# Altium PCB Necklace_pcb.PcbDoc
Units mm, origin at the board's own origin, x right, y up, seen from the top; angles counter-clockwise.
Board outline 19 x 27.9 mm, 2 copper layers (Top Layer, Bottom Layer), stack 0.36 mm thick; 18 components, 16 nets, 55 pads, 20 vias.
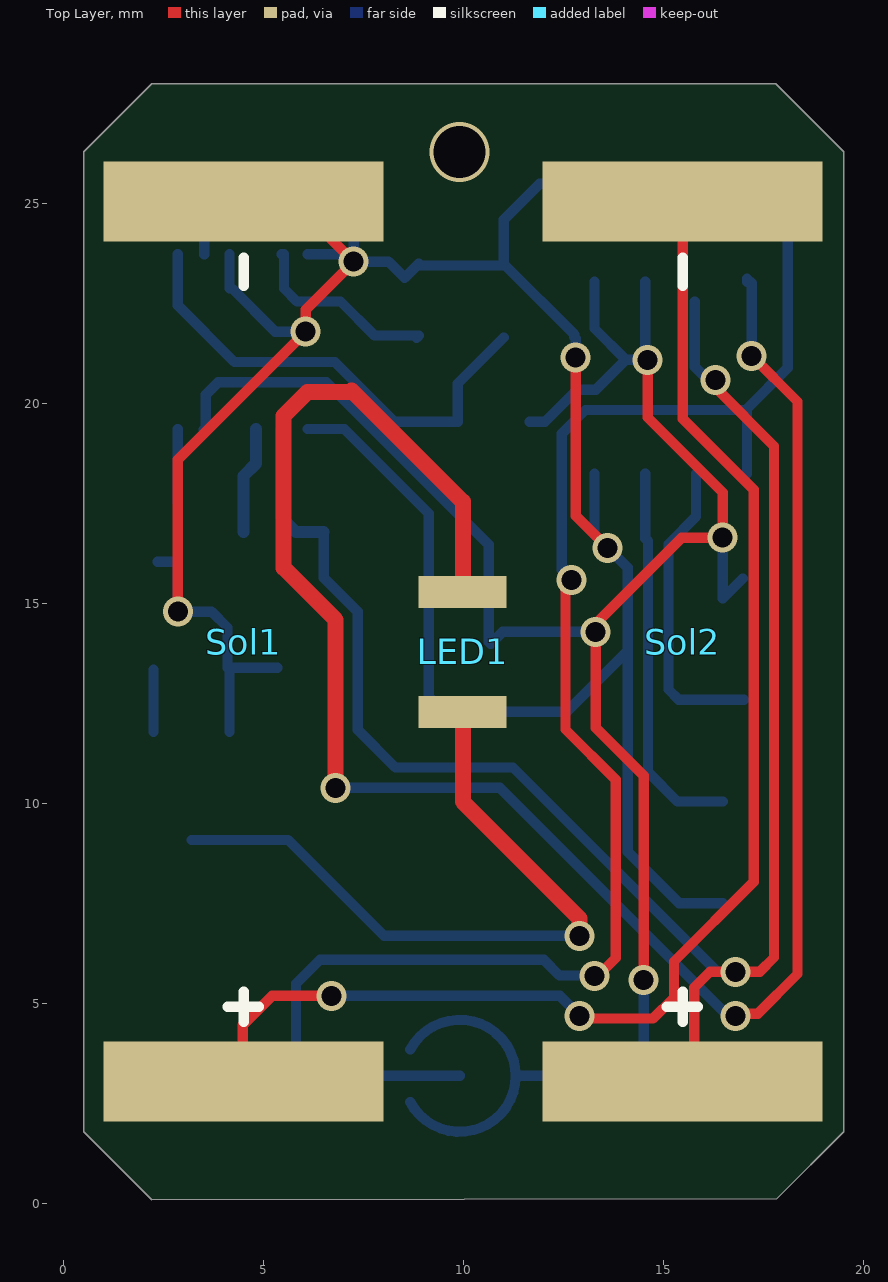
[diagram p0: Top Layer view]
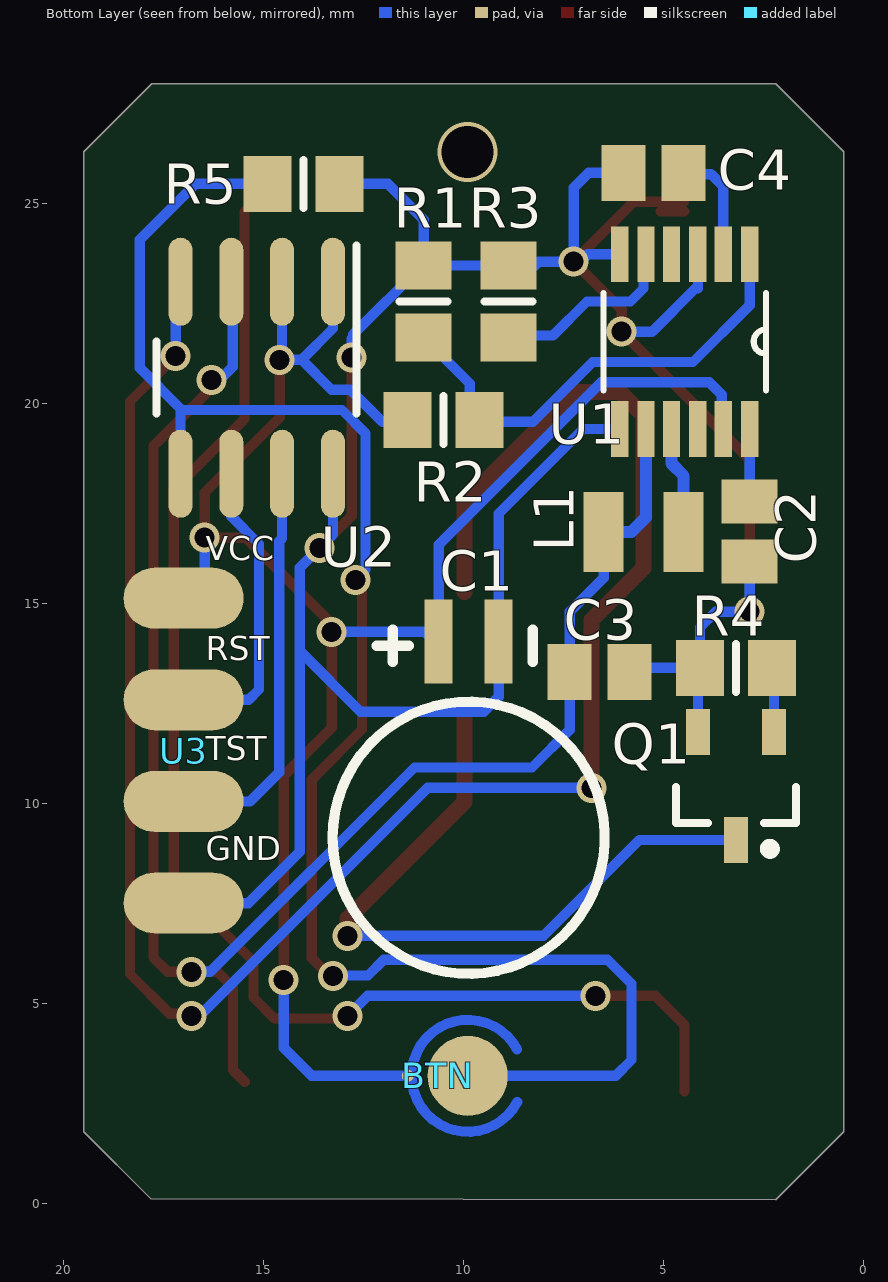
[diagram p1: Bottom Layer view, seen from below]

## Layer stack, top to bottom
Top Solder: solder mask 0.0102, Solder Resist, Dk 3.5
Top Layer: signal copper 0.03
Core: core 0.3, Dk 4.2
Bottom Layer: signal copper 0.03
Bottom Solder: solder mask 0.0102, Solder Resist, Dk 3.5

## Board outline
0.5,1.8 0.5,26.3 2.2,28 17.8,28 19.5,26.3 19.5,1.8 17.83,0.13 2.2,0.1

## Design rules (kind name [scope] priority, off if disabled: settings)
Clearance [All] p1: gap=0.254 ignorepadtopadclearanceinfootprint=FALSE except(0: Arc-Hole Track-Hole SMDPad-Hole THPad-Hole Via-Hole Fill-Hole Poly-Hole Region-Hole Text-Hole; 0.05: SMDPad-SMDPad SMDPad-THPad THPad-THPad; 0.125: Fill-Fill Fill-Poly Fill-Region Poly-Poly Poly-Region Region-Region)
PolygonConnect [All] p1: connectstyle=Relief reliefconductorwidth=0.254 reliefentries=4 polygonreliefangle="90 Angle" airgapwidth=0.254
RoutingVias [All] p1: holewidth=0.711 width=2 viastyle="Through Hole" minholewidth=0.5 minwidth=0.6 maxholewidth=2 maxwidth=3
SolderMaskExpansion [All] p1: expansion=0.1
Width [All] p1: maxlimit=1 minlimit=0.254 preferedwidth=0.254
30 further rules are at their usual default settings.

## Components (designator, comment, footprint, x,y, rotation, side; value= is the part's Value field where it differs from the comment)
BTN "Touch_sensor" TOUCH_SENSOR 9.9,3.2 r180 bottom
C1 "DMS3R3224R Supercap" "DMS3R3224R Supercap" 9.875,9.152 r90 bottom
C2 "Cap Semi" C0805 2.851,16.802 r90 bottom value=1uF
C3 "Cap Semi" C0805 6.6,13.3 r0 bottom value=10uF
C4 "Cap Semi" C0805 5.25,25.775 r0 bottom value=4.7uF
L1 "Inductor" INDUCTIVITY 6.75,15.3 r180 bottom
LED1 "3528_LED" 3528_LED 9.975,12.3 r90 top
Q1 "JFET" SOT23_N 3.196,10.224 r270 bottom
R1 "Res3" 6-0805_N 11,22.558 r270 bottom value=510k
R2 "Res3" 6-0805_N 10.5,19.6 r0 bottom value=1.1M
R3 "Res3" 6-0805_N 8.875,22.552 r270 bottom value=300k
R4 "Res3" 6-0805_N 3.193,13.4 r180 bottom value="200 (R=UGS/Id)"
R5 "Res3" 6-0805_N 14,25.5 r0 bottom value=8.2M
Sol1 "Solar Panel" Solarzelle 8,1.052 r90 top
Sol2 "Solar Panel" Solarzelle 18.975,1.052 r90 top
U1 "LTC3105EMSPBF" SOP65P490X110-12N 4.477,21.554 r270 bottom
U2 "MSP430G2210IDR" MSP430G2210 15.175,20.652 r270 bottom
U3 "Program_connector" PROGRAM_CONNECTOR 17,15.14 r0 bottom

## Footprints (in the part's own frame and the unit in brackets; to place one, negate y for a bottom-side part, rotate by r counter-clockwise, add the part's x,y. Pads: shape width x height; smd on the part's side, far side on the other; paste and mask are expansions set on the pad)
6-0805_N [mm] "Chip Resistor, Body 2.0x1.2mm, IPC Medium Density"
  rect 1.2x1.4 smd: 1(-0.9,0) 2(0.9,0)
  silkscreen extent 0,-0.6 0,0.6, body extent -1.07,-0.7 1.07,0.7, height 0.7
3528_LED [mm]
  rect 0.8x2.2 smd: 0(3,0) 1(0,0)
  body extent -0.25,-1.25 3.25,1.25, height 1
C0805 [mm] "Chip Capacitor, Body 2.0x1.3mm, IPC High Density"
  rect 1.1x1.4 smd: 1(-0.75,0) 2(0.75,0)
  body extent -1.1,-0.72 1.1,0.72, height 1.4
"DMS3R3224R Supercap" [mm]
  rect 2.1x0.7 smd: 0(4.9,0.75) 1(4.9,-0.75)
  silkscreen extent -3.4,-3.4 5.2,3.4, body extent -3.4,-3.4 5.6,3.4, height 1.8
INDUCTIVITY [mm]
  rect 1x2 smd: 0(0.25,1.5) 1(2.25,1.5)
  body extent -0.25,0 2.75,3, height 1
MSP430G2210 [mm] "SOIC, 8-Leads, Body 4.9x3.9mm, Pitch 1.27mm, IPC Medium Density"
  oval 2.2x0.6 smd: 1(-2.4,1.905) 2(-2.4,0.635) 3(-2.4,-0.635) 4(-2.4,-1.905) 5(2.4,-1.905) 6(2.4,-0.635) 7(2.4,0.635) 8(2.4,1.905)
  silkscreen extent -3.3,-2.5 0.9,2.5, body extent -3,-2.45 3,2.45, height 1.63
PROGRAM_CONNECTOR [mm]
  oval 3x1.524 smd: 0(0,0) 1(0,2.54) 2(0,5.08) 3(0,7.62)
Solarzelle [mm]
  rect 2x7 smd: 0(2,3.5) 1(24,3.5)
  silkscreen extent 3.5,3.12 22.6,3.9, body extent 2,0 24,7, height 1.6
SOP65P490X110-12N [mil]
  rect 55x17 smd: 1(-86,64) 2(-86,38) 3(-86,13) 4(-86,-13) 5(-86,-38) 6(-86,-64) 7(86,-64) 8(86,-38) 9(86,-13) 10(86,13) 11(86,38) 12(86,64)
  silkscreen extent -48,-80 48,80
SOT23_N [mm] "SOT23, 3-Leads, Body 2.9x1.3mm, Pitch 0.95mm, Lead Span 2.3mm - Reverse Pinning, IPC Medium Density"
  rect 1.15x0.6 smd: 1(1.125,0) 2(-1.576,-0.95) 3(-1.576,0.95)
  silkscreen extent -0.2,-1.5 1.47,1.5, body extent -0.7,-1.5 0.7,1.5, height 1.1
TOUCH_SENSOR [mm]
  round 2 smd mask+0.1: 0(0,0)
  round 0.3 smd: 1(-1.5,0)
  Top Layer lines w0.254: 1.238,-0.654 cw(c0,0) 1.235,0.659

## Part data
C1: Capacity=220mF
C2 C3 C4: "Capacitor (Semiconductor SIM Model)", LatestRevisionDate=29-May-2009, LatestRevisionNote="IPC-7351 Footprint Added.", PackageDescription="Chip Capacitor", PackageReference=C1206, Published=8-Jun-2000, Publisher="Altium Limited"
L1: library part Inductivity
Q1: library part MOSFET-N, "N-Channel MOSFET", LatestRevisionDate=17-Jul-2002, LatestRevisionNote="Re-released for DXP Platform.", PackageDescription="TO, Flat Index; 3 In-Line, Axial Leads; Body Dia. 4.6mm; Lead Dia. 0.5 mm (max)", PackageReference=E3, PackageVersion=1995/1996, Published=8-Jun-2000, Publisher="Altium Limited"
R1 R2 R3 R4 R5: "Resistor", LatestRevisionDate=29-May-2009, LatestRevisionNote="IPC-7351 Footprint Added.", PackageDescription="Chip Resistor", PackageReference=J1-0603, Published=8-Jun-2000, Publisher="Altium Limited"
Sol1 Sol2: library part Solar_Panel
  Sol2: Name=KXOB22-04X3F, Vmpp=1.5V
U1: "Ic Conv Dc/Dc Step Down 12-Msop", Package="MSOP-12 Linear Technology", Availability=Unavailable, MF="Linear Technology/Analog", MP=LTC3105EMS#PBF, Price=None, SnapEDA_Link=https://www.snapeda.com/parts/LTC3105EMS%23PBF/Linear%20Technology/Analog%20Devices/view-part/?ref=snap
U2: "MIXED SIGNAL MICROCONTROLLER, D0008A", Alternate Manufacturer="Texas Instruments", Alternate PartNumber=MSP430G2210ID, ComponentLink1Description="Datasheet Link", ComponentLink1URL=http://www.ti.com/lit/ds/symlink/msp430g2210.pdf, CompType=IC, LatestRevisionDate=2015-05-28, Manufacturer="Texas Instruments", MountType=SMT, PackageReference=D0008A, PartNumber=MSP430G2210IDR, Publisher="Texas Instruments", RoHS=Y, SymbolCreator=Altium, SymbolVersion=2015-05-26, U/M=EA

## Via types
v1: diameter 0.75, hole 0.5, Top Layer to Bottom Layer, 19 vias
v2: diameter 1.5, hole 1.3, Top Layer to Bottom Layer, 1 vias

## Nets (pads, with @x,y where several pads share a name; then routed paths per layer and width w, separated by ;. In a path a pad name is that pad's centre, name@x,y a point inside that pad or via, vN(x,y) a via of type N, cw(c..) or ccw(c..) an arc to the next point about the centre after c; other vN are vias at no path point)
Capacitive_Sensor: BTN.0 R5.2 U2.5 | length 43.4
  Top Layer w0.254: v1@12.7,15.5 v1(12.7,15.6) 12.544,15.444 12.544,11.856 13.8,10.6 13.8,6.144 v1@13.4,5.744
  Bottom Layer w0.254: BTN.0 6.2,3.2 5.805,3.595 5.805,5.5 6.405,6.1 12,6.1 12.392,5.708 13.262,5.708 v1(13.27,5.7) ; v1(12.7,15.6) 12.452,15.848 12.452,19.252 13.044,19.844 17.044,19.844 17.08,19.88 ; R5.2 16.701,25.5 18.1,24.101 18.1,20.9 17.08,19.88 ; U2.5 17.08,19.88
FB: R1.2 R2.1 U1.1 | length 12.1
  Bottom Layer w0.254: U1.1 2.851,22.462 4.267,21.046 6.774,21.046 8.268,19.552 9.85,19.552 9.85,20.508 R1.2
GND: C1.1 C2.1 C3.1 C4.2 Q1.2 R1.1 R3.1 R4.1 R5.1 Sol1.1 U1.3 U1.6 U1.7 U2.8 U3.3 | length 71.8
  Top Layer w0.254: v1(2.851,14.802) 2.851,18.603 v1(6.05,21.802) 6.05,22.352 v1(7.25,23.552) 5.75,25.052 Sol1.1 ; Sol1.1@4.477,24.804 Sol1.1@5.075,24.804 ; v1(12.8,21.16) 12.8,17.2 v1(13.6,16.4)
  Bottom Layer w0.254: C2.1@2.352,16.052 C2.1 v1(2.851,14.802) 3.698,14.802 4.093,14.407 R4.1 C3.1@5.343,13.4 ; Q1.2 R4.1@4.146,13.346 ; U1.3 4.146,22.881 4.211,22.881 5.29,21.802 v1(6.05,21.802) ; C4.2 6.875,25.775 7.25,25.4 v1(7.25,23.552) 8.123,23.552 8.523,23.152 8.875,23.504 8.921,23.458 R1.1 ; U1.7 7.014,19.369 9.125,17.259 C1.1 9.125,12.677 9.5,12.302 12.58,12.302 14.089,13.811 ; U1.6 6.902,23.738 v1@7.088,23.552 ; v1(12.8,21.16) 12.8,21.634 12.762,21.672 12.762,21.735 11.039,23.458 R1.1 ; R5.1 11.9,25.5 11,24.6 R1.1 ; U2.8 13.27,16.73 v1(13.6,16.4) 14.1,15.9 14.1,8.8 15.386,7.514 U3.3@16.477,7.514
LED_out: LED1.0 U2.4 | length 50.6
  Top Layer w0.254: v1(16.8,4.7) 16.8,4.652 16.7,4.752 17.352,4.752 18.344,5.744 18.344,20.056 v1(17.2,21.2)
  Top Layer w0.4: v1(6.8,10.4) 6.8,14.6 5.5,15.9 5.5,19.7 6.1,20.3 7.2,20.3 7.2,20.33 9.977,17.554 LED1.0@9.977,15.3
  Bottom Layer w0.254: v1(6.8,10.4) 10.9,10.4 16.6,4.7 v1(16.8,4.7) ; U2.4 17.08,23.132 17.2,23.012 v1(17.2,21.2)
NetC2_2: C2.2 U1.12 | length 1.8
  Bottom Layer w0.254: C2.2 U1.12
NetC4_1: C4.1 U1.2 | length 2.8
  Bottom Layer w0.254: U1.2 3.511,25.436 3.815,25.74 C4.1@4.5,25.74
NetLED1_1: LED1.1 Q1.1 | length 17.5
  Top Layer w0.4: LED1.1@9.977,12.3 9.977,10.054 12.9,7.13 v1(12.9,6.7)
  Bottom Layer w0.254: Q1.1 5.607,9.099 8.005,6.7 v1(12.9,6.7)
NetQ1_3: Q1.3 R4.2 | length 1.6
  Bottom Layer w0.254: Q1.3 R4.2@2.246,13.354
NetR3_2: R3.2 U1.5 | length 4.9
  Bottom Layer w0.254: U1.5 5.505,23.738 5.505,22.882 5.829,22.558 6.919,22.558 7.773,21.704 8.875,21.704 R3.2@8.823,21.652
RST: U2.6 U3.1 | length 7.7
  Bottom Layer w0.254: U2.6 15.81,17.187 15.119,16.496 15.119,12.858 15.377,12.6 U3.1
SHDN: U1.4
SW: L1.1 U1.9 | length 2.7
  Bottom Layer w0.3: L1.1 4.5,18.2 4.807,18.507 U1.9
Test: U2.7 U3.2 | length 9.7
  Bottom Layer w0.254: U2.7 14.54,16.635 14.611,16.564 14.611,10.789 15.346,10.054 U3.2@16.477,10.054
VCC: BTN.1 C1.0 R2.2 U1.11 U2.1 U2.2 U3.0 | length 49
  Top Layer w0.254: v1(14.5,5.6) 14.5,10.7 13.3,11.9 v1(13.3,14.3) 13.298,14.3 13.198,14.4 15.45,16.652 v1(16.475,16.652) 16.475,17.783 14.6,19.658 v1(14.6,21.1)
  Bottom Layer w0.254: U1.11@3.5,19.358 U1.11 3.55,19.407 3.55,20.226 3.862,20.538 6.564,20.538 10.625,16.477 C1.0 10.675,14.002 10.973,14.3 v1(13.3,14.3) ; BTN.1 13.8,3.2 14.5,3.9 v1(14.5,5.6) ; R2.2@11.65,19.552 12.034,19.552 12.834,20.352 13.304,20.352 14.052,21.1 ; U2.1 13.27,21.882 14.052,21.1 ; U2.2 14.54,21.16 v1(14.6,21.1) 14.052,21.1 ; v1(16.475,16.652) 16.475,15.135 16.477,15.134 U3.0@16.975,15.632
VCC_GND_solar: Sol1.0 Sol2.1 | length 34.4
  Top Layer w0.254: Sol1.0@4.477,2.804 4.477,4.464 5.213,5.2 v1(6.7,5.2) ; v1(12.9,4.7) 12.971,4.629 14.729,4.629 15.256,5.156 15.256,6.056 17.25,8.05 17.25,17.85 15.477,19.623 Sol2.1@15.477,24.804
  Bottom Layer w0.254: v1(6.7,5.2) 12.4,5.2 v1(12.9,4.7)
VCC_solar: C3.2 L1.0 Sol2.0 U1.8 U2.3 | length 42.8
  Top Layer w0.254: Sol2.0 15.764,3.341 15.764,5.408 16.156,5.8 v1(16.8,5.8) 17.4,5.8 17.758,6.158 17.758,18.942 16.3,20.4 v1(16.3,20.6)
  Bottom Layer w0.254: 5.442,18.458 5.447,18.464 ; U1.8 U1.8@5.447,19.364 ; L1.0 6.5,15.65 7.35,14.8 C3.2 7.35,11.85 8.292,10.908 11.232,10.908 16.34,5.8 v1(16.8,5.8) ; U2.3@15.775,22.552 15.775,20.925 16.1,20.6 v1(16.3,20.6)
  Bottom Layer w0.3: 5.442,18.458 5.442,17.163 5.805,16.8 L1.0 ; 5.447,18.464 U1.8@5.447,19.364
pads on no net: U1.10
copper on no net:
  other v2: 9.9,26.3

## Silkscreen, mask and mechanical layers (free items; w line width, h text height)
Mechanical 5:
  lines w0.254: 19.5,26.298 19.5,1.8 17.825,0.125 2.2,0.125 2.175,0.125 0.5,1.8 0.5,2.25 0.5,26.298 2.202,28 17.8,28 19.5,26.3

## Text inside footprints (layer, text, board x,y; h text height)
U3: Bottom Overlay "GND" at 16.45,8.59 h0.6; Bottom Overlay "TST" at 16.45,11.09 h0.6; Bottom Overlay "RST" at 16.45,13.59 h0.6; Bottom Overlay "VCC" at 16.45,16.09 h0.6